# Altium PCB ESIMA_E_Meter_CPU Stand 2014_11_24.PcbDoc (part 1 of 2)
Units mm, origin at the board's own origin, x right, y up, seen from the top; angles counter-clockwise.
Board outline 113.5 x 71.72 mm, 4 copper layers (Top Layer, Mid1, Mid2, Bottom Layer), stack 0.778 mm thick; 166 components, 164 nets, 522 pads, 109 vias.
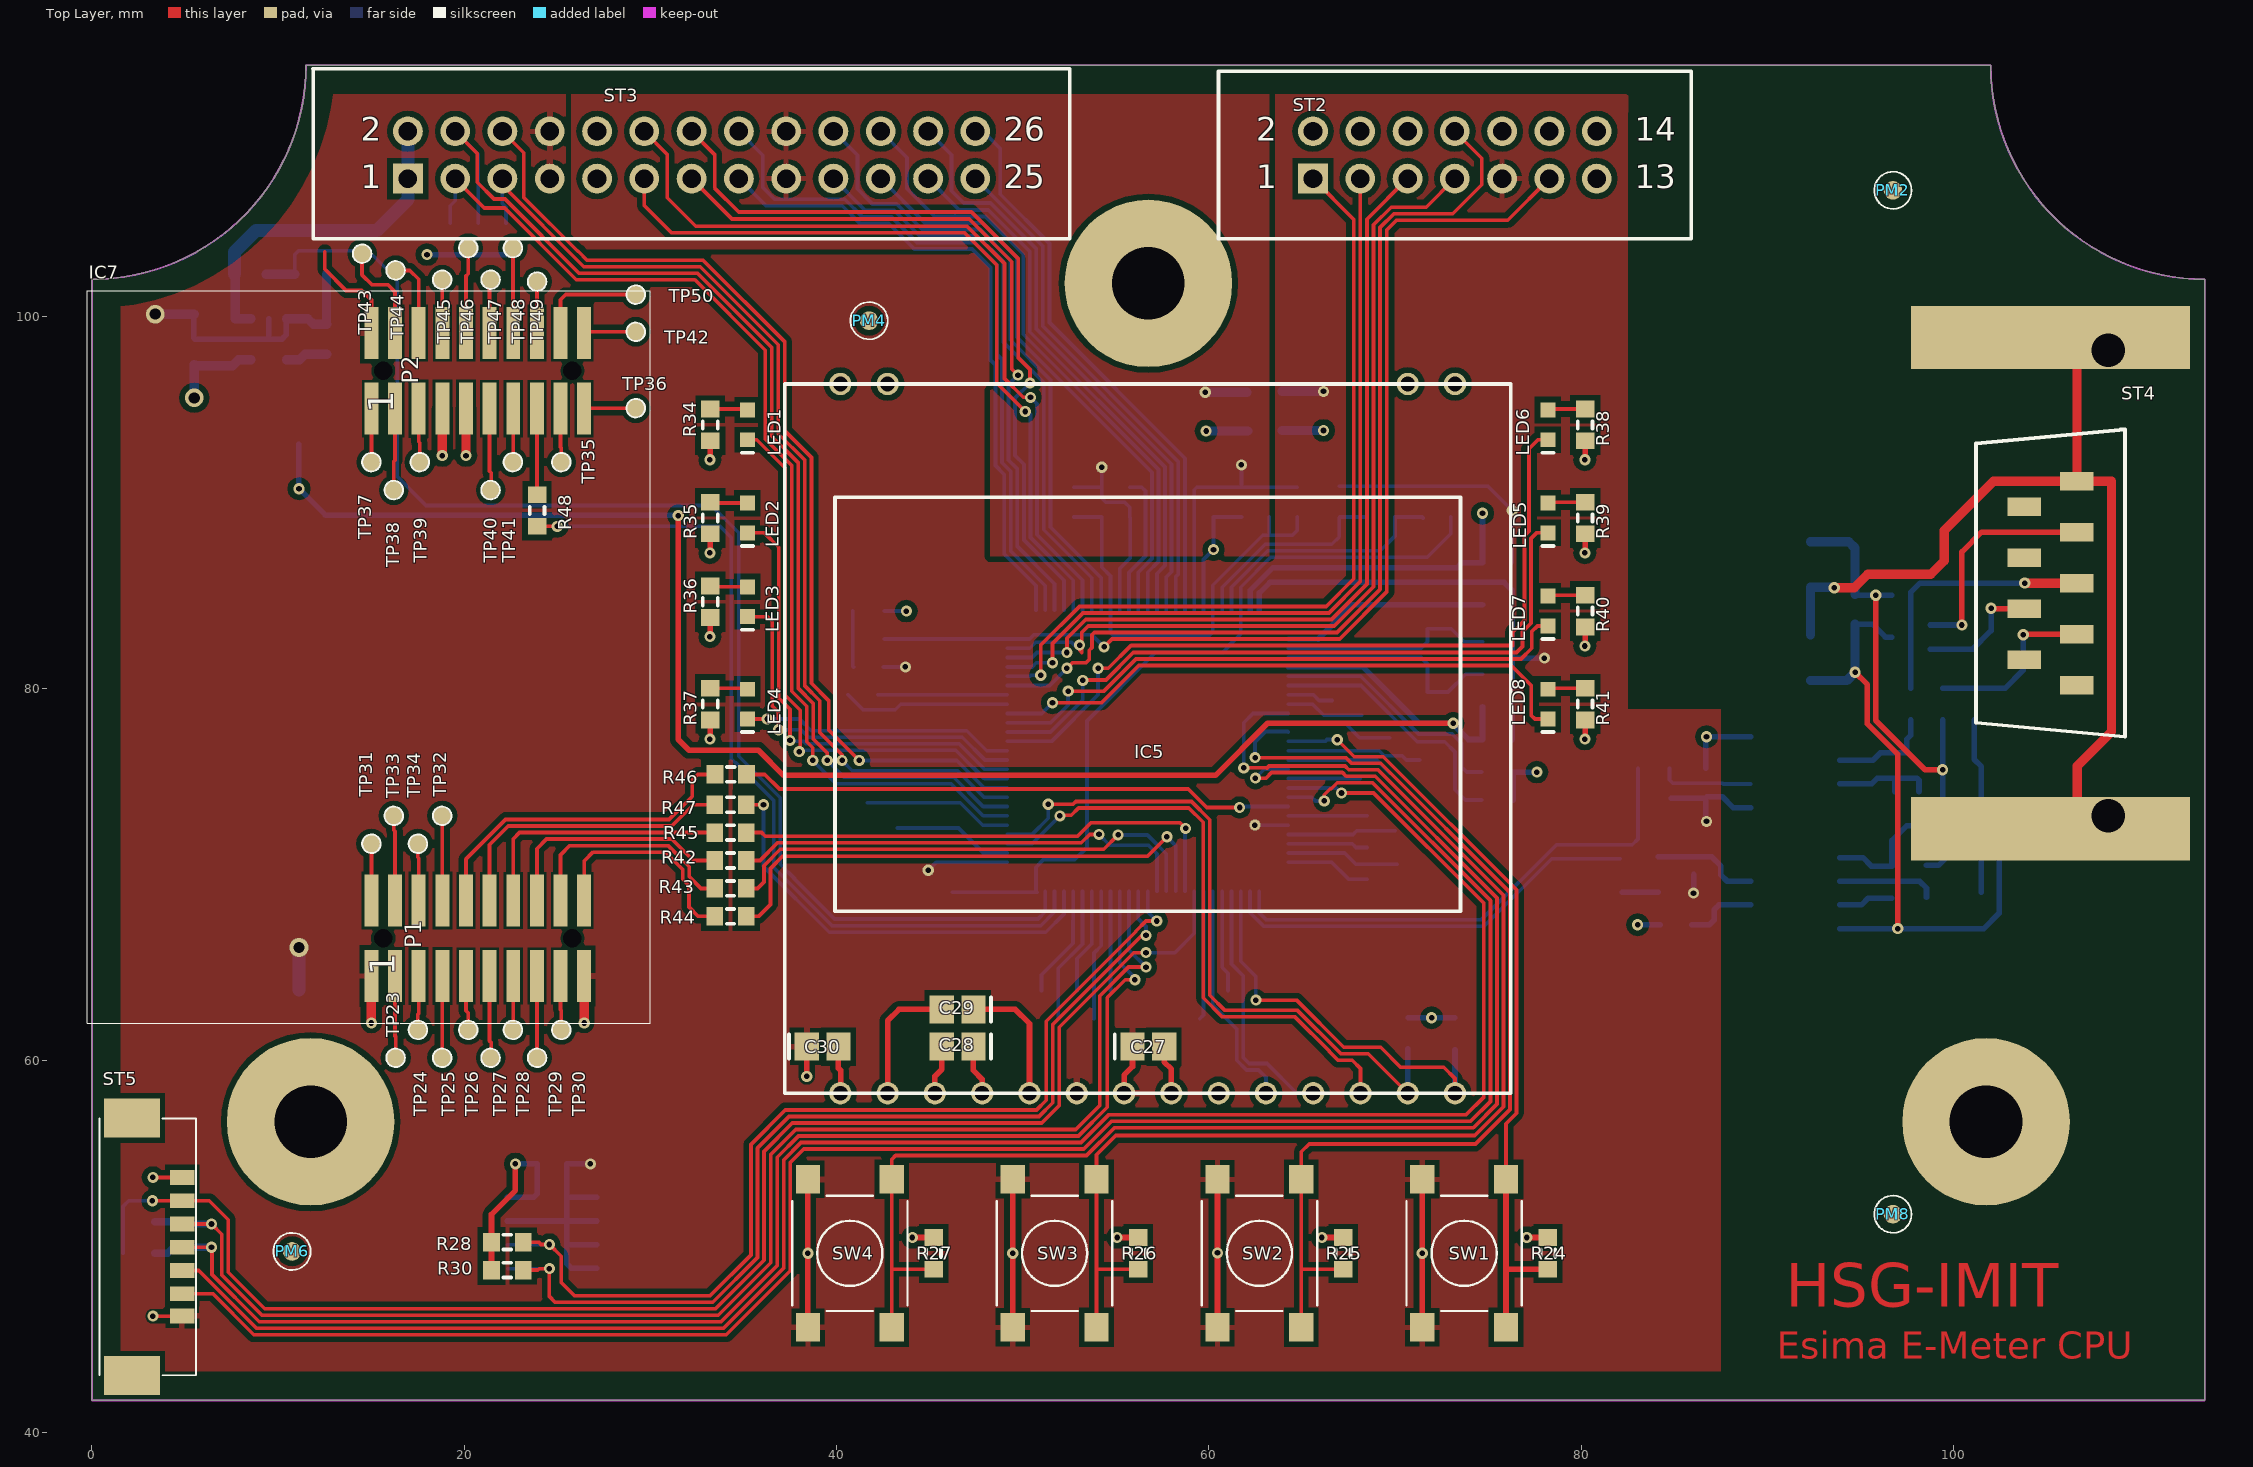
[diagram p0: Top Layer view]
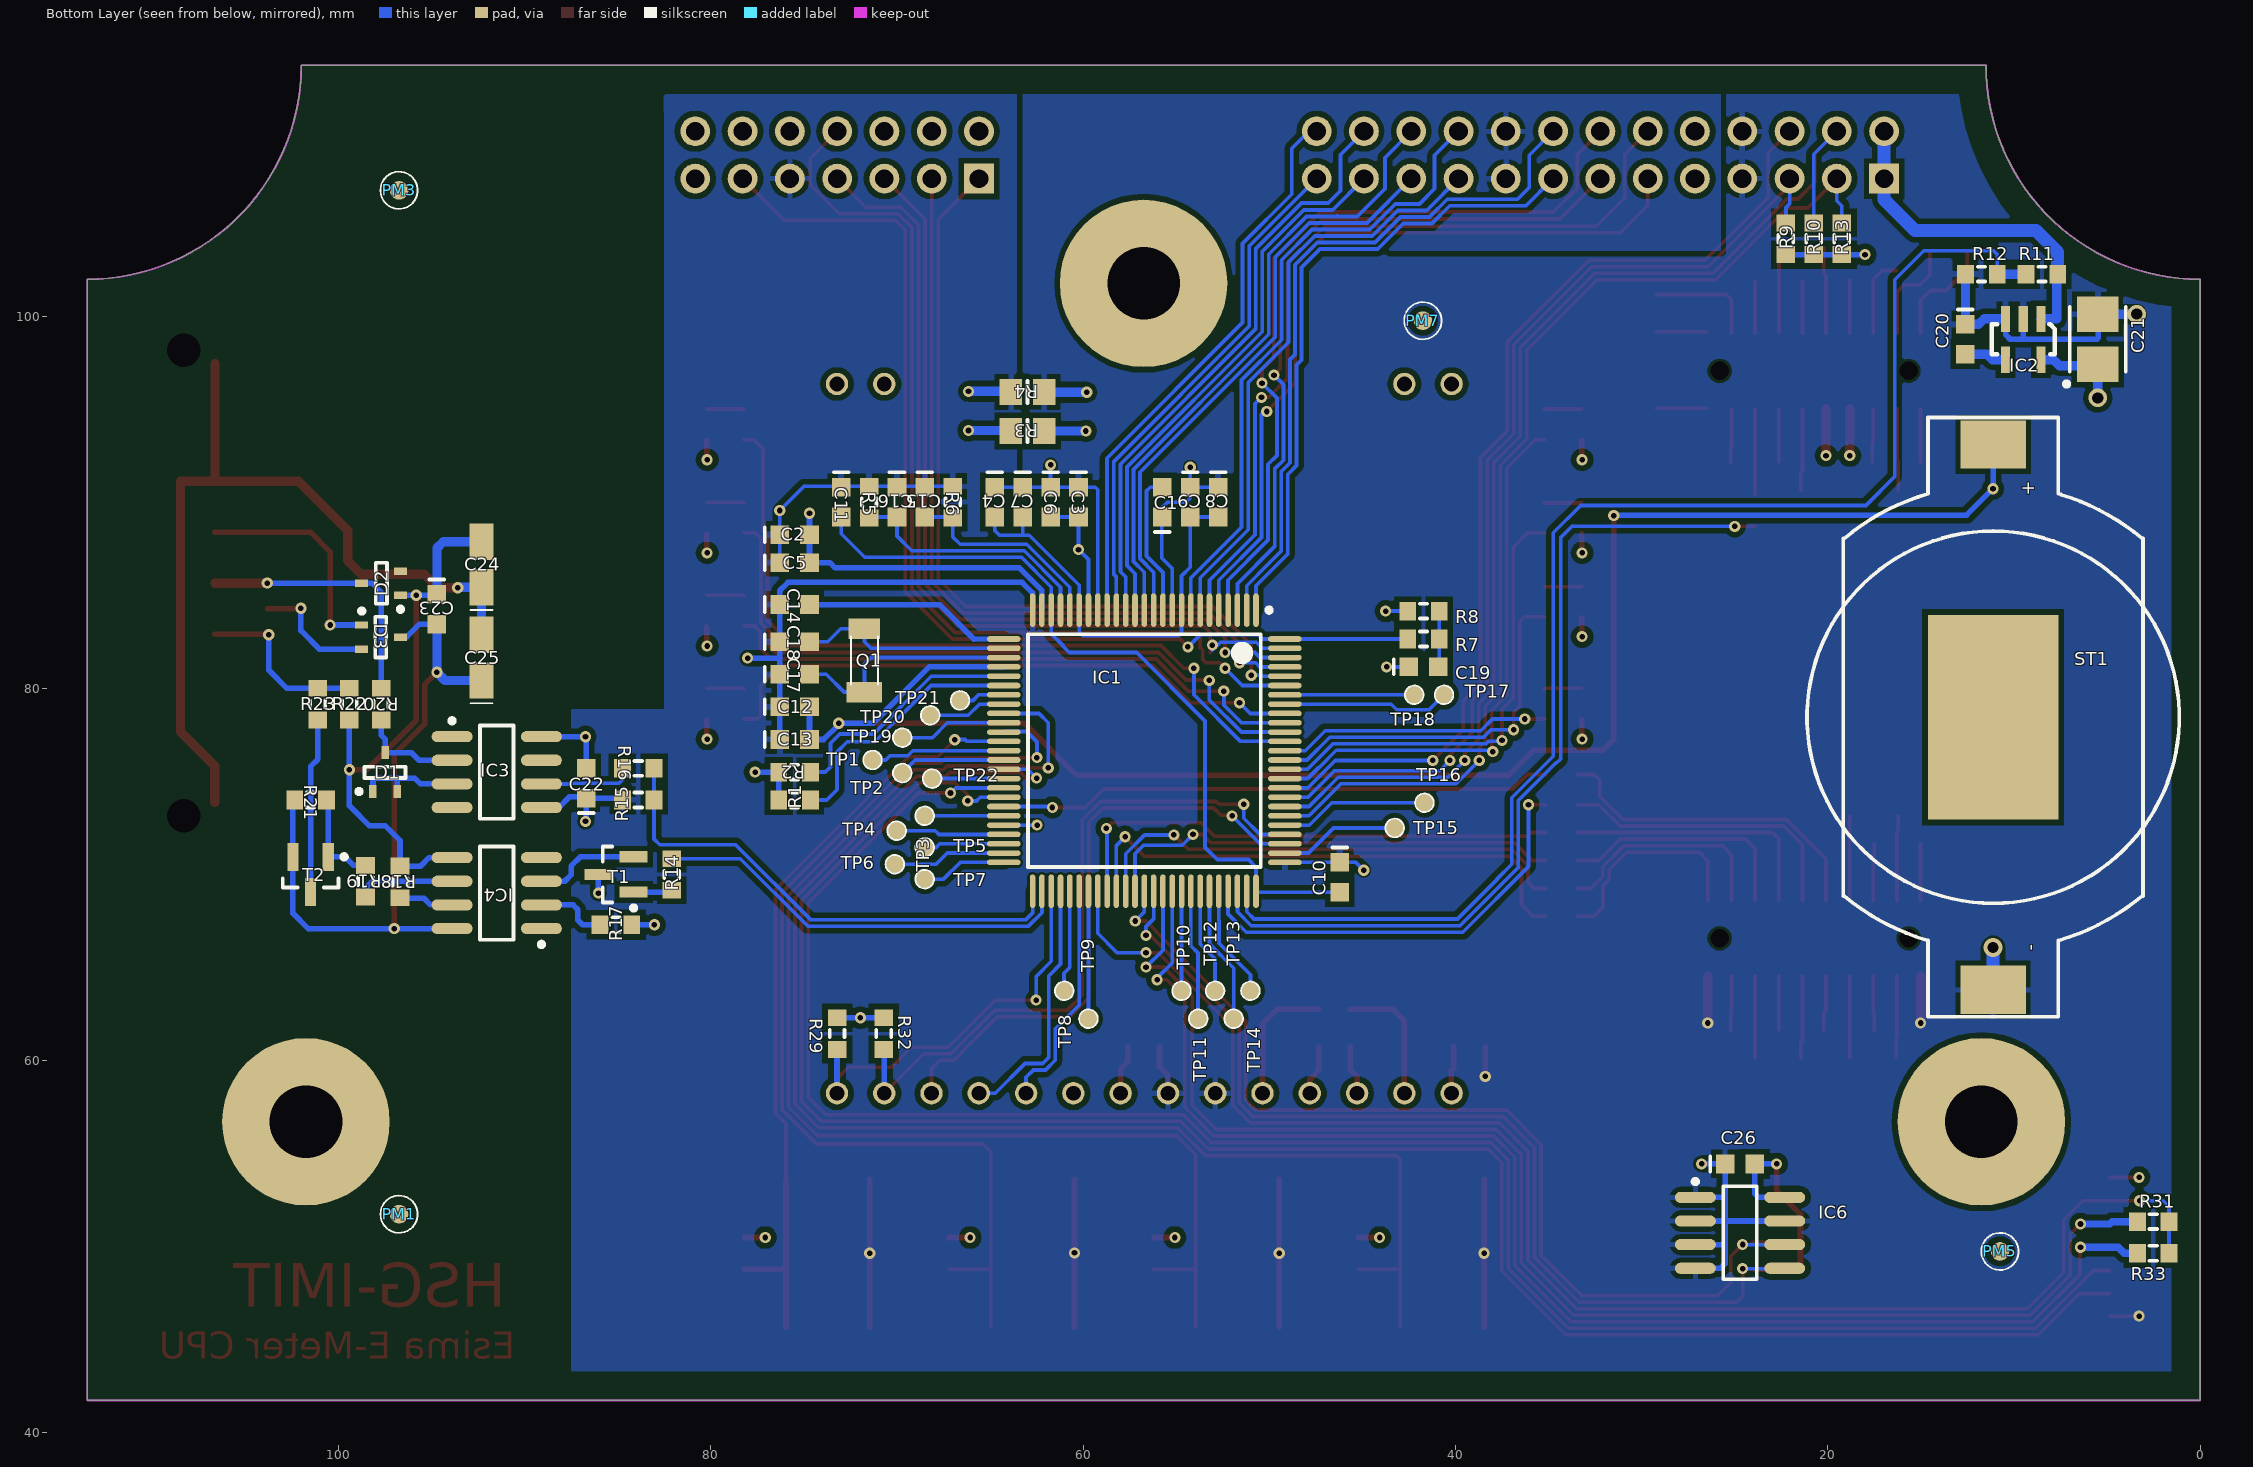
[diagram p1: Bottom Layer view, seen from below]
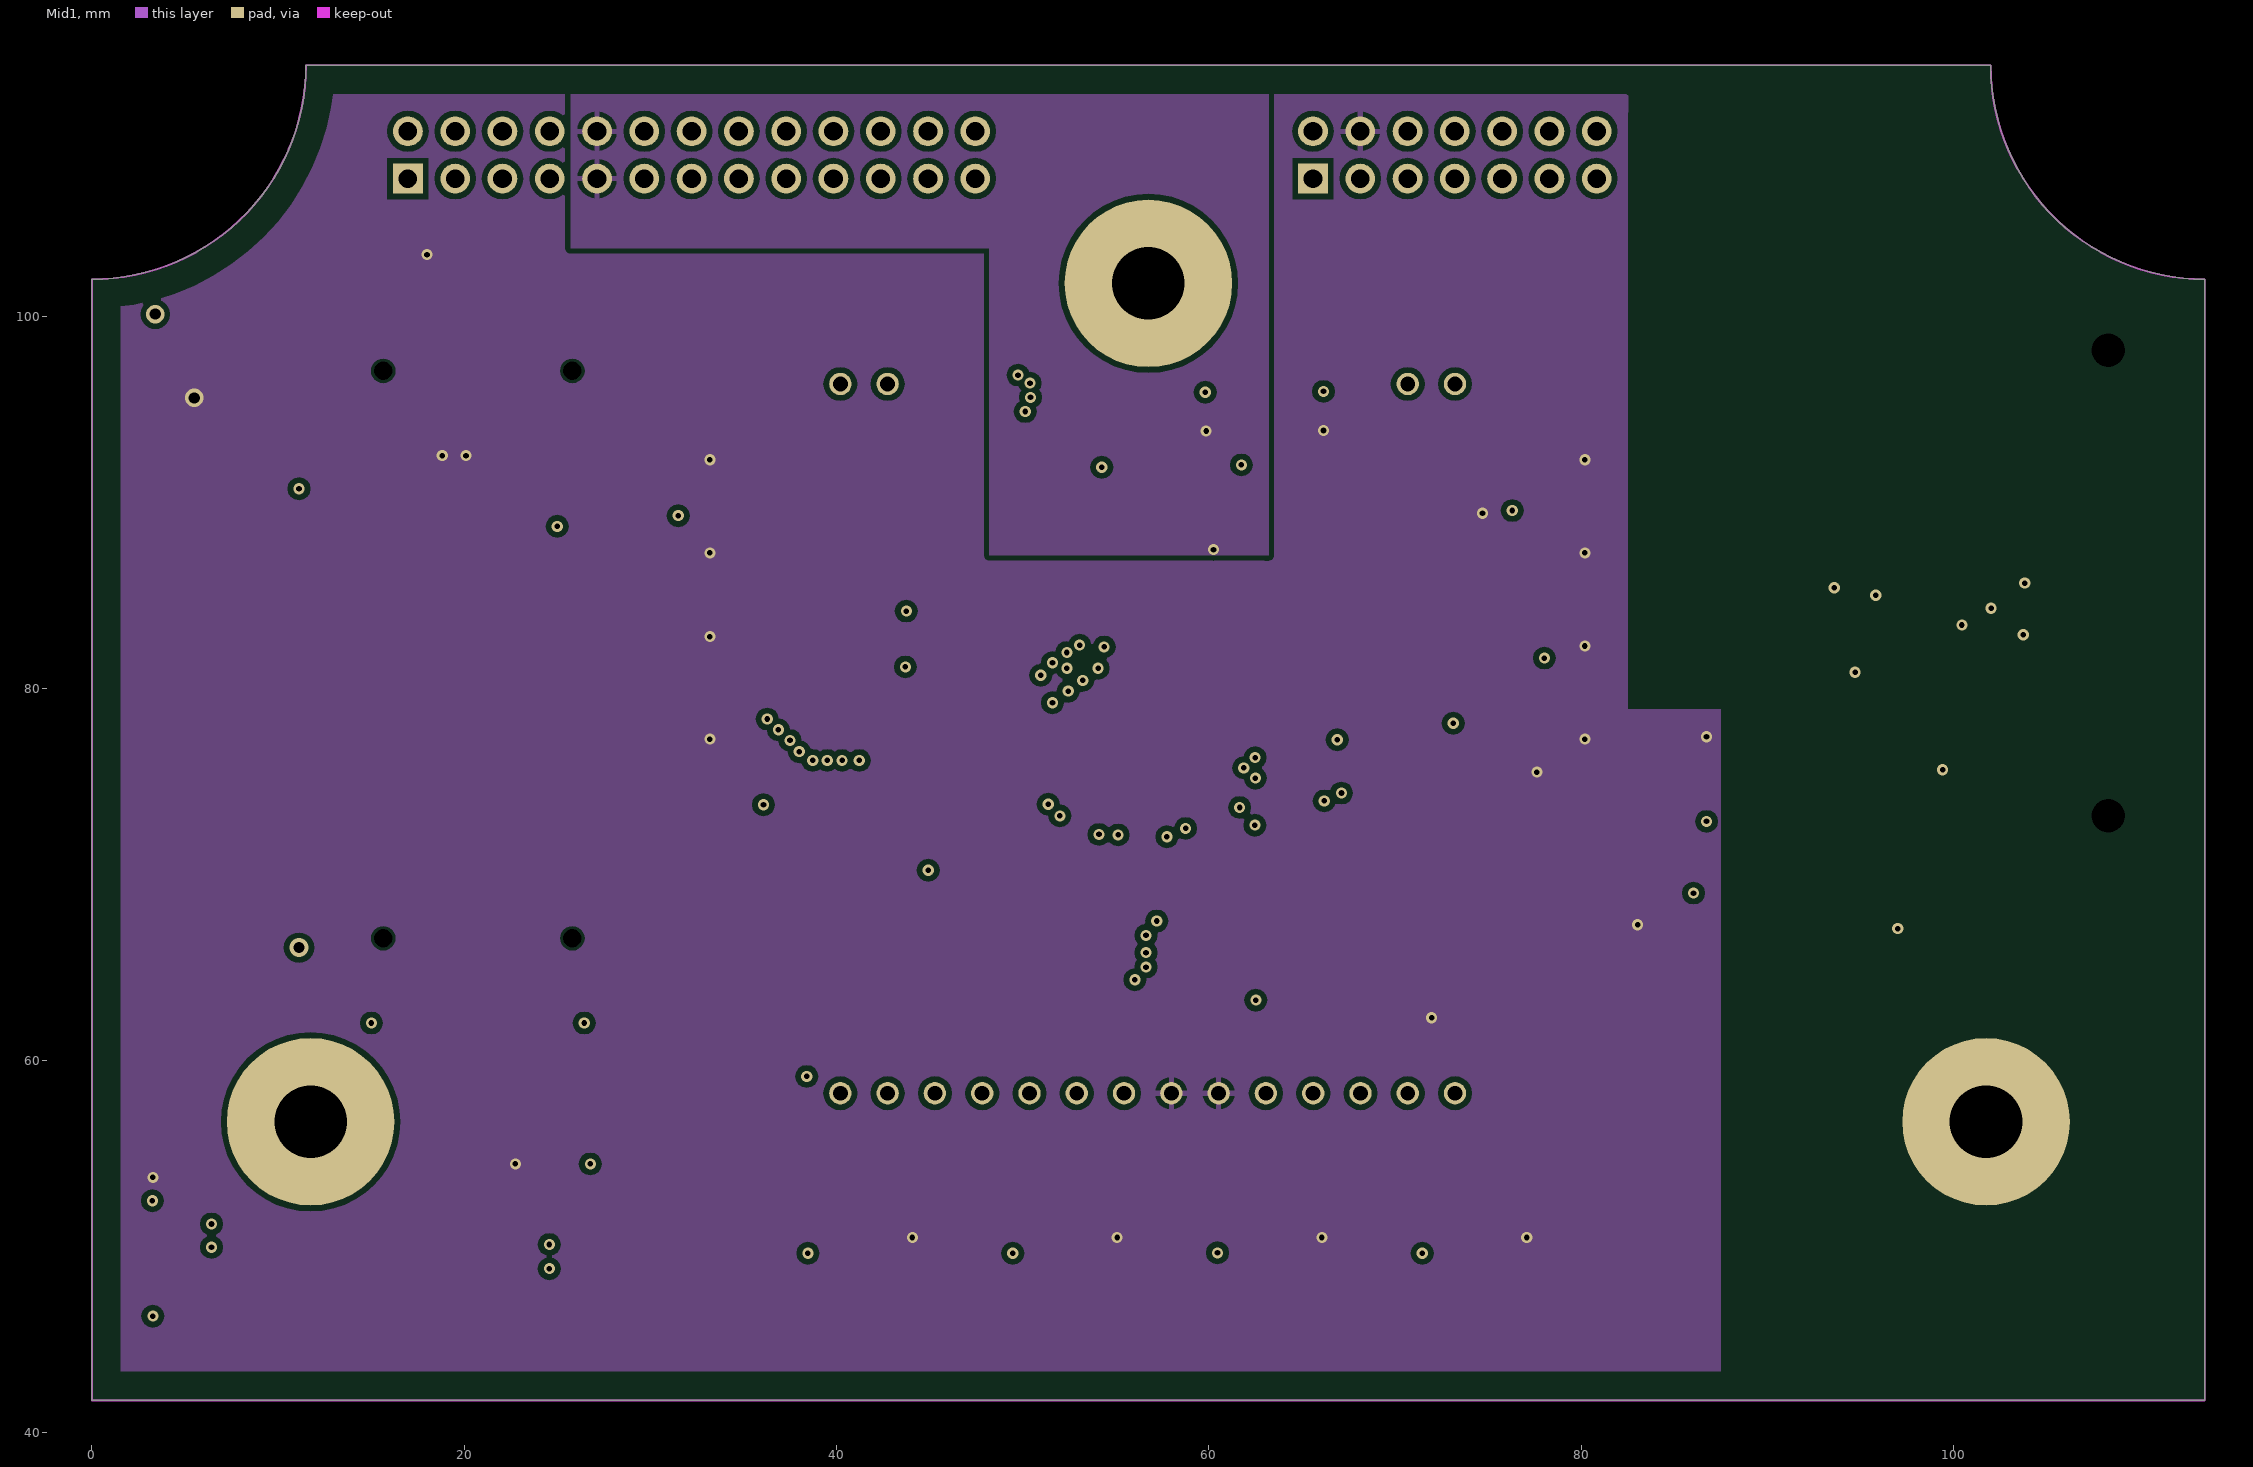
[diagram p2: Mid1]
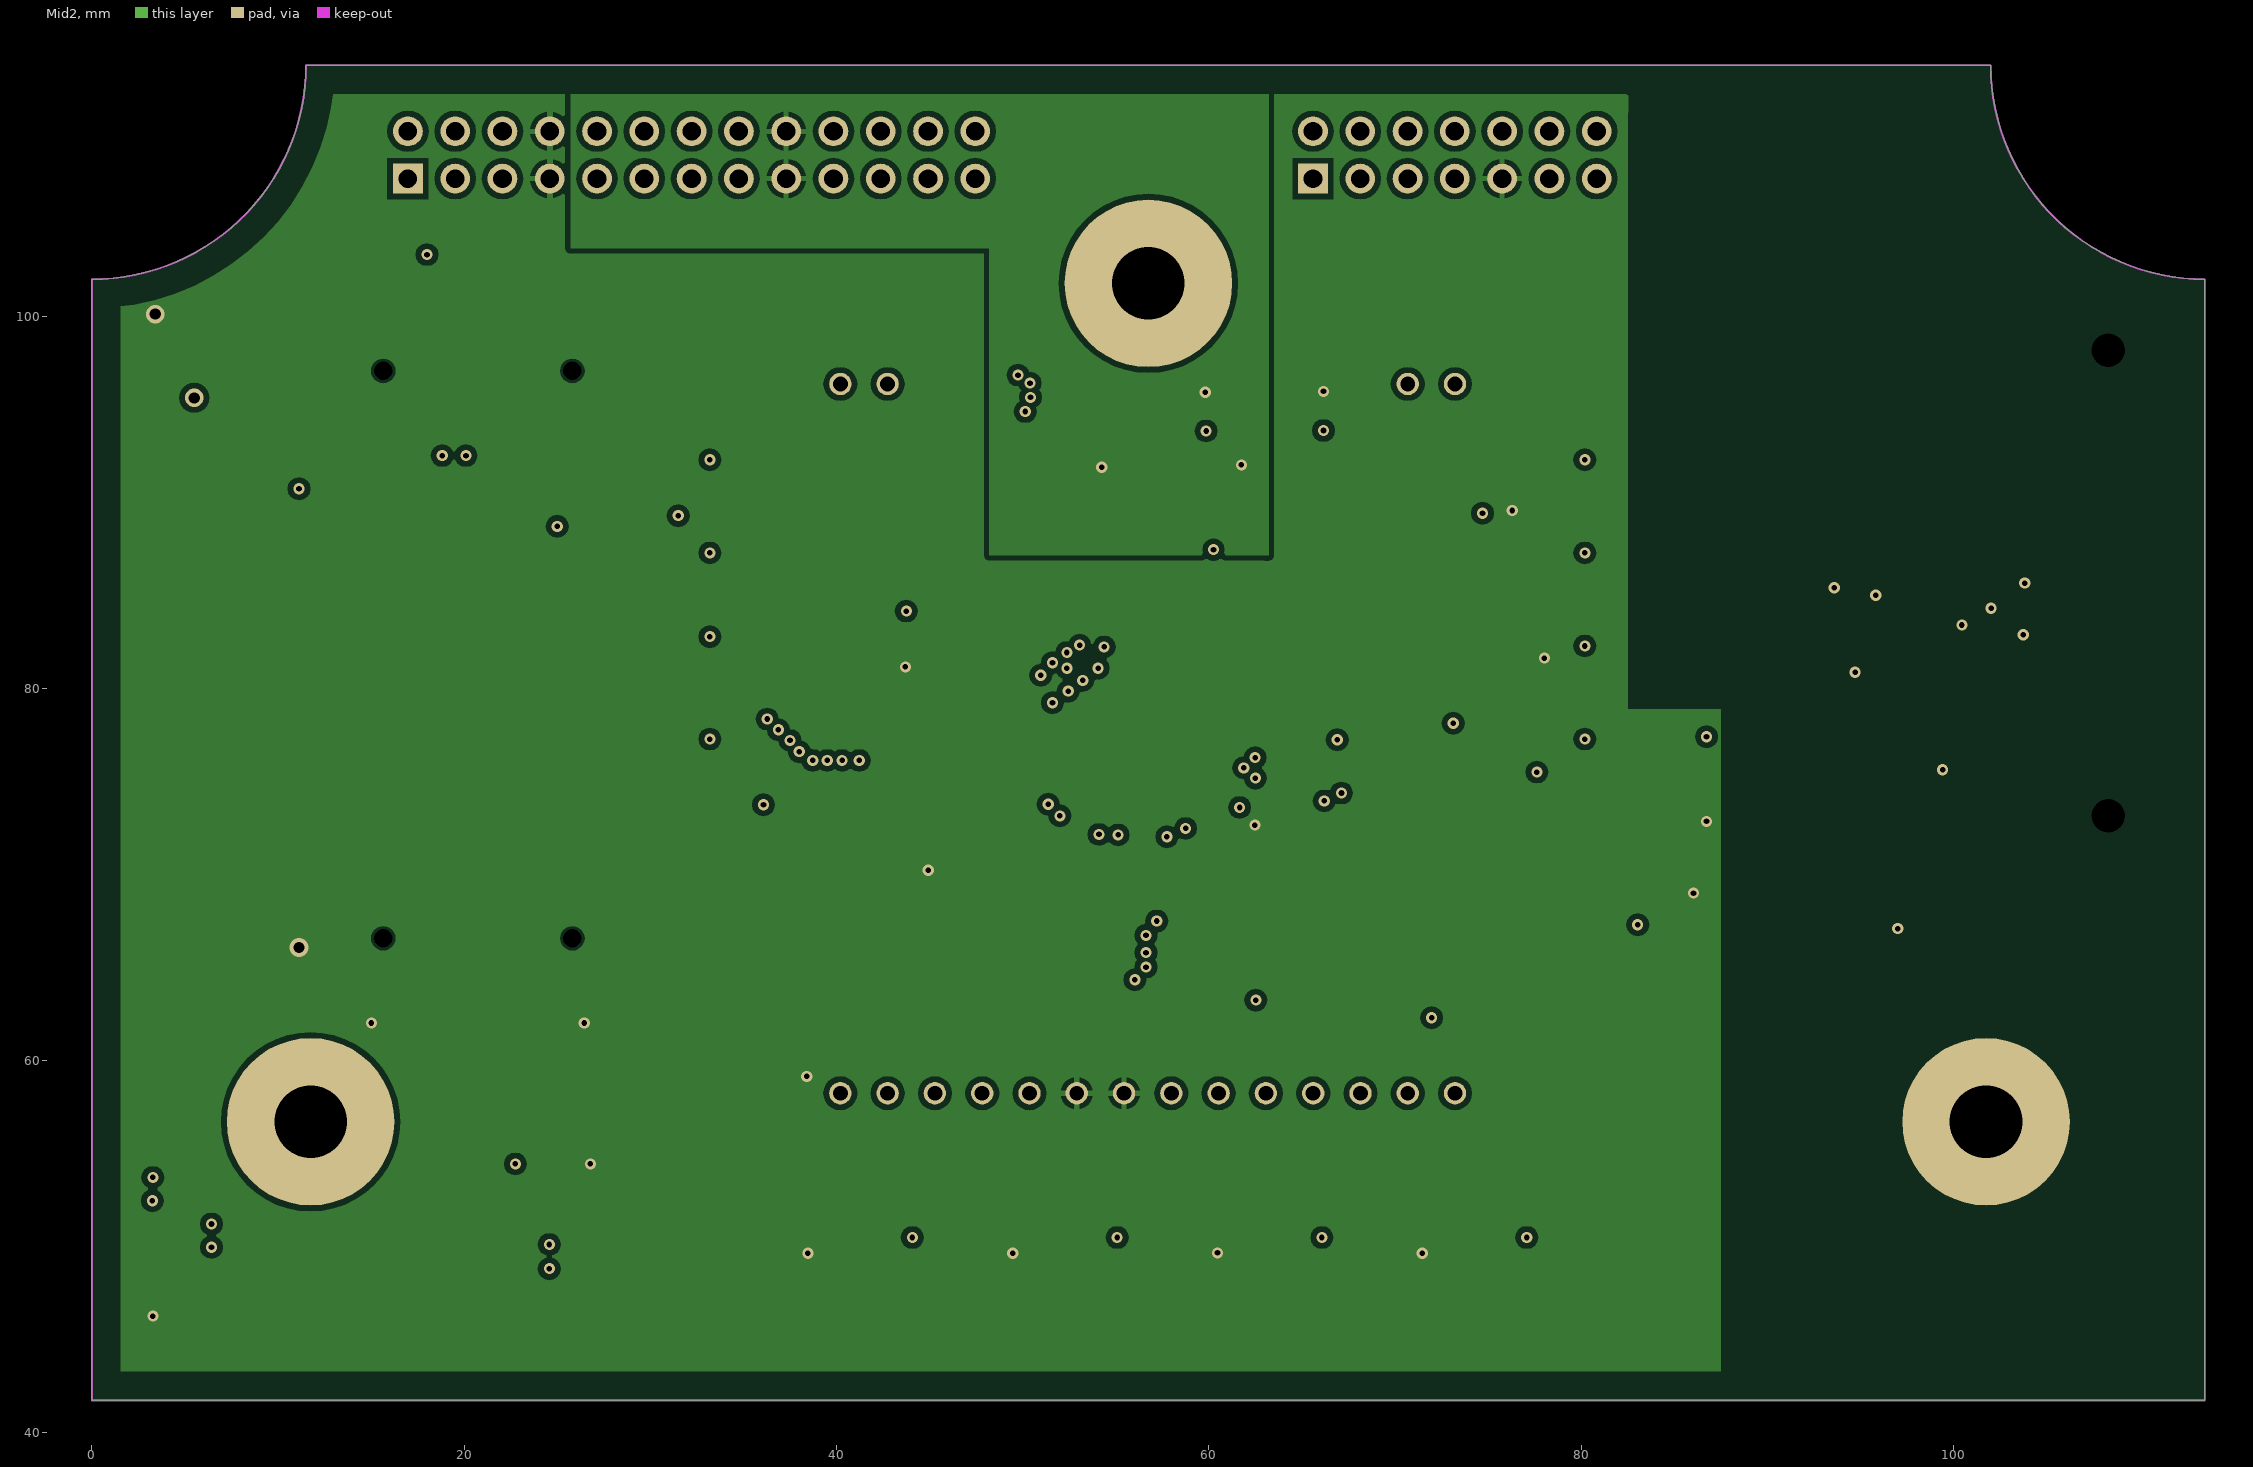
[diagram p3: Mid2]

## Layer stack, top to bottom
Top Solder: solder mask 0.0102, Solder Resist, Dk 3.5
Top Layer: signal copper 0.0356
Dielectric 1: core 0.254, FR-4, Dk 4.2
Mid1: signal copper 0.036
Dielectric 2: prepreg 0.127, Dk 4.2
Mid2: signal copper 0.036
Dielectric 3: core 0.254, Dk 4.2
Bottom Layer: signal copper 0.0356
Solder Side: solder mask 0.0102, Solder Resist, Dk 3.5

## Board outline
0,41.75 0,101.972 ccw(c0,113.472) 11.5,113.472 102,113.472 ccw(c113.5,113.472) 113.5,101.972 113.5,41.75

## Design rules (kind name [scope] priority, off if disabled: settings)
Clearance FineComponents [InComponent('IC1')   or InComponent('IC7')] p1: gap=0.15
Clearance Via-Trace [(IsVia) vs (IsTrack)or(isVia)] p2: gap=0.15
Clearance Via-Pad [(IsVia) vs (InPadClass('All Pads'))] p3: gap=0.1
Clearance Pad-Trace [(InPadClass('All Pads')) vs IsTrack] p4: gap=0.2
Clearance Trace-Trace [IsTrack vs IsTrack] p5: gap=0.15
Clearance Polygon-KeepOut [InPolygon vs (OnLayer('Keep-Out Layer'))] p6: gap=1.5
Clearance "Polygon - All" [InPolygon] p7: gap=0.3
Clearance [All] p8: gap=0.3
Clearance "All Rest" [All] p9: gap=0.3
ComponentClearance [All] p1: gap=0.4 collisioncheckmode=3 verticalgap=0.4 showdistances=FALSE
FabricationTestPointUsage TestPointUsage [All] p1: valid=0 allowmultiple=FALSE
FabricationTestpoint Testpoint [(IsPad And (OnTopLayer Or OnBottomLayer))] p1: side=3 testpointundercomponent=TRUE minsize=0.8 maxsize=1.2 preferedsize=1 minholesize=0 maxholesize=0 preferedholesize=0 testpointgrid=0.1 allowsidetop=TRUE allowsidebottom=TRUE usegrid=TRUE gridtolerance=0
Height [All] p1: minheight=0 maxheight=14.5 prefheight=10
HoleSize [All] p1: absolutevalues=TRUE maxlimit=5.5 minlimit=0.2 maxpercent=80.000 minpercent=20.000
PlaneClearance [All] p1: clearance=0.2
PlaneConnect [All] p1: planeconnectstyle=Relief reliefexpansion=0.5 reliefentries=4 reliefconductorwidth=0.5 reliefairgap=0.2
PolygonConnect VIA [All vs ISVIA] p1: connectstyle=Direct reliefconductorwidth=0.254 reliefentries=4 polygonreliefangle="90 Angle" airgapwidth=0.254
PolygonConnect [All] p2: connectstyle=Relief reliefconductorwidth=0.3 reliefentries=4 polygonreliefangle="90 Angle" airgapwidth=0.254
RoomDefinition "U_ESIMA E-Meter_RS232" [InComponentClass('U_ESIMA E-Meter_RS232')] p1: confinementstyle=ConfineIn formatcopy=TRUE lockcomponents=FALSE outline 79.75,64.5 114.75,64.5 114.75,102.5 79.75,102.5
RoomDefinition "U_ESIMA E-Meter_Radio" [InComponentClass('U_ESIMA E-Meter_Radio')] p2: confinementstyle=ConfineIn formatcopy=TRUE lockcomponents=FALSE outline -4.877,47.1 37,47.1 37,115.25 -4.877,115.25
RoomDefinition "U_ESIMA E-Meter_LCD" [InComponentClass('U_ESIMA E-Meter_LCD')] p3: confinementstyle=ConfineIn formatcopy=TRUE lockcomponents=FALSE outline -2.718,41.275 116.129,41.275 116.129,114.25 -2.718,114.25
RoomDefinition "U_ESIMA E-Meter_CPU" [InComponentClass('U_ESIMA E-Meter_CPU')] p4: confinementstyle=ConfineIn formatcopy=TRUE lockcomponents=FALSE outline -3.785,41.148 115.715,41.148 115.715,114 -3.785,114
RoomDefinition "ESIMA E-Meter_CPUBlock" [InComponentClass('ESIMA E-Meter_CPUBlock')] p5: confinementstyle=ConfineIn formatcopy=TRUE lockcomponents=FALSE outline -4.5,103.276 53.543,103.276 53.543,114.5 -4.5,114.5
RoutingCorners [All] p1: cornerstyle=45-Degree minsetback=0.5 maxsetback=1
RoutingVias [All] p1: holewidth=0.3 width=0.6 viastyle="Through Hole" minholewidth=0.3 minwidth=0.6 maxholewidth=0.4 maxwidth=1
SilkToSolderMaskClearance SilkscreenOverComponentPads [IsPad] p1: minsilkscreentomaskgap=0.254 clearancetoexposedcopper=TRUE
SolderMaskExpansion [All] p1: expansion=0
UnpouredPolygon [All] p1: allowunpoured=FALSE
Width [All] p1: maxlimit=1 minlimit=0.15 preferedwidth=0.2 minimp=50.000000 maximp=50.000000 favimp=50.000000
20 further rules are at their usual default settings.

## Classes and differential pairs
net class V-[1..3]: V-1 V-2 V-3
net class V+[1..3]: V+1 V+2 V+3
net class I-[1..4]: I-1 I-2 I-3 I-4
net class I+[1..4]: I+1 I+2 I+3 I+4
component class "U_ESIMA E-Meter_RS232": C22 C23 C24 C25 D1 D2 D3 IC3 IC4 R14 R15 R16 R17 R18 R19 R20 R21 R22 R23 ST4 T1 T2
component class "U_ESIMA E-Meter_CPU": C1 C2 C3 C4 C5 C6 C7 C8 C9 C10 C11 C12 C13 C14 C15 C16 C17 C18 C19 C20 C21 IC1 IC2 Q1 R1 R2 R3 R4 R5 R6 R7 R8 R9 R10 R11 R12 R13 ST1 ST2 TP1 TP2 TP3 TP4 TP5 TP6 TP7 TP8 TP9 TP10 TP11 TP12 TP13 TP14 TP15 TP16 TP17 TP18 TP19 TP20 TP21 TP22
component class "ESIMA E-Meter_CPUBlock": ST3
component class "U_ESIMA E-Meter_LCD": C26 C27 C28 C29 C30 IC5 IC6 LED1 LED2 LED3 LED4 LED5 LED6 LED7 LED8 PM1 PM2 PM3 PM4 PM5 PM6 PM7 PM8 R24 R25 R26 R27 R28 R29 R30 R31 R32 R33 R34 R35 R36 R37 R38 R39 R40 R41 ST5 SW1 SW2 SW3 SW4
component class "U_ESIMA E-Meter_Radio": IC7 R42 R43 R44 R45 R46 R47 R48 TP23 TP24 TP25 TP26 TP27 TP28 TP29 TP30 TP31 TP32 TP33 TP34 TP35 TP36 TP37 TP38 TP39 TP40 TP41 TP42 TP43 TP44 TP45 TP46 TP47 TP48 TP49 TP50 TP51 TP52
net class BT[1..4]: BT1 BT2 BT3 BT4
net class LED[1..8]: LED1 LED2 LED3 LED4 LED5 LED6 LED7 LED8

## Components (designator, comment, footprint, x,y, rotation, side; value= is the part's Value field where it differs from the comment)
C1 "100nF" CAPC1608N 55.75,90 r90 bottom
C2 "4.7uF" CAPC1608N 75.5,88.25 r180 bottom
C3 "4.7uF" CAPC1608N 60.25,90 r270 bottom
C4 "4.7uF" CAPC1608N 64.75,90 r270 bottom
C5 "100nF" CAPC1608N 75.5,86.75 r180 bottom
C6 "100nF" CAPC1608N 61.75,90 r270 bottom
C7 "100nF" CAPC1608N 63.25,90 r270 bottom
C8 "4.7uF" CAPC1608N 52.75,90 r270 bottom
C9 "100nF" CAPC1608N 54.25,90 r270 bottom
C10 "100nF" CAPC1608N 46.215,69.85 r270 bottom
C11 "4.7uF" CAPC1608N 73,90 r270 bottom
C12 "0.47uF" CAPC1608N 75.5,79 r180 bottom
C13 "100nF" CAPC1608N 75.5,77.25 r180 bottom
C14 "0.47uF" CAPC1608N 75.5,84.5 r180 bottom
C15 "na" CAPC1608N 68.5,90 r270 bottom
C16 "na" CAPC1608N 70,90 r270 bottom
C17 "DNP" CAPC1608N 75.5,80.75 r180 bottom
C18 "DNP" CAPC1608N 75.5,82.5 r180 bottom
C19 "2.2nF" CAPC1608N 41.715,81.15 r180 bottom
C20 "10nF" CAPC1608N 12.615,98.75 r270 bottom
C21 "4.7uF" "Cap Tant Pol Form B" 5.5,98.75 r90 bottom
C22 "100nF" CAPC1608N 86.7,74.9 r90 bottom
C23 "100nF" CAPC1608N 94.715,84.25 r270 bottom
C24 "10uF/16V" "Cap Tant Pol Form A" 92.315,86.65 r90 bottom
C25 "10uF/16V" "Cap Tant Pol Form A" 92.315,81.65 r90 bottom
C26 "100nF" CAPC1608N 24.715,54.45 r180 bottom
C27 "1uF" CAPC2012N 56.75,60.75 r0 top
C28 "1uF" CAPC2012N 46.5,60.75 r180 top
C29 "1uF" CAPC2012N 46.5,62.75 r180 top
C30 "1uF" CAPC2012N 39.25,60.75 r0 top
D1 "BAS40-05W" "SOT-323N (SC-70)" 97.5,75.5 r180 bottom
D2 "BAS40-05W" "SOT-323N (SC-70)" 97.715,85.65 r90 bottom
D3 "BAS40-05W" "SOT-323N (SC-70)" 97.715,82.75 r270 bottom
IC1 "MSP430F6779APZ" TI-PZ100_N 56.715,76.65 r270 bottom locked
IC2 "TPS78930" "TI-DBV5 (SOT23-5)" 9.5,98.75 r270 bottom
IC3 "PS8801" SOIC127P600-8N 91.5,75.5 r180 bottom
IC4 "PS8801" SOIC127P600-8N 91.5,69 r0 bottom
IC5 "EA DOGS102x-6" "EA DOGS102X-6" 56.715,79.15 r180 top locked
IC6 "24C02C-E/SN" SOIC-SN8_N 24.715,50.75 r180 bottom
IC7 "CC2541EM#" CC2530EM-Board 30,62 r90 top locked
LED1 "150060SS75000" 0603 35.215,94.15 r90 top
LED2 "150060VS75000" 0603 35.215,89.15 r90 top
LED3 "150060YS75000" 0603 35.215,84.65 r90 top
LED4 "150060SS75000" 0603 35.215,79.15 r90 top
LED5 "150060VS75000" 0603 78.215,89.15 r90 top
LED6 "150060SS75000" 0603 78.215,94.15 r90 top
LED7 "150060YS75000" 0603 78.215,84.15 r90 top
LED8 "150060SS75000" 0603 78.215,79.15 r90 top
PM1 "Passmarke 1mm" "Passmarke Rund 1mm" 96.75,51.75 r180 bottom
PM2 "Passmarke 1mm" "Passmarke Rund 1mm" 96.75,106.75 r0 top
PM3 "Passmarke 1mm" "Passmarke Rund 1mm" 96.75,106.75 r180 bottom
PM4 "Passmarke 1mm" "Passmarke Rund 1mm" 41.75,99.75 r0 top
PM5 "Passmarke 1mm" "Passmarke Rund 1mm" 10.75,49.75 r180 bottom
PM6 "Passmarke 1mm" "Passmarke Rund 1mm" 10.75,49.75 r0 top
PM7 "Passmarke 1mm" "Passmarke Rund 1mm" 41.75,99.75 r180 bottom
PM8 "Passmarke 1mm" "Passmarke Rund 1mm" 96.75,51.75 r0 top
Q1 "CM415 32.768KDZF-UT" "Quarz 2 Pin 4.1mm * 1.5mm" 71.75,81.5 r90 bottom
R1 "100k" RESC1608N 75.5,74 r0 bottom
R2 "100k" RESC1608N 75.5,75.5 r0 bottom
R3 "1k" RESC2012N 62.985,93.825 r0 bottom
R4 "1k" RESC2012N 62.985,95.925 r0 bottom
R5 "0" RESC1608N 71.5,90 r270 bottom
R6 "0" RESC1608N 67,90 r270 bottom
R7 "10k" RESC1608N 41.715,82.65 r180 bottom
R8 "47k" RESC1608N 41.715,84.15 r180 bottom
R9 "470k" RESC1608N 22.25,104.15 r90 bottom
R10 "470k" RESC1608N 20.75,104.15 r90 bottom
R11 "nd" RESC1608N 8.5,102.25 r180 bottom
R12 "nd" RESC1608N 11.75,102.25 r180 bottom
R13 "470k" RESC1608N 19.25,104.15 r90 bottom
R14 "2.2k" RESC1608N 82.1,70 r90 bottom
R15 "DNP" RESC1608N 83.9,74 r0 bottom
R16 "2.2k" RESC1608N 83.9,75.7 r180 bottom
R17 "68" RESC1608N 85.1,67.3 r0 bottom
R18 "DNP" RESC1608N 96.7,69.6 r270 bottom
R19 "1k" RESC1608N 98.55,69.635 r270 bottom
R20 "1k" RESC1608N 97.715,79.15 r270 bottom
R21 "10k" RESC1608N 101.5,74 r180 bottom
R22 "1.5k" RESC1608N 99.415,79.15 r90 bottom
R23 "220" RESC1608N 101.115,79.15 r90 bottom
R24 "100k" RESC1608N 78.215,49.65 r90 top
R25 "100k" RESC1608N 67.215,49.65 r90 top
R26 "100k" RESC1608N 56.215,49.65 r90 top
R27 "100k" RESC1608N 45.215,49.65 r90 top
R28 "10k" RESC1608N 22.315,48.75 r180 top
R29 "47k" RESC1608N 73.215,61.45 r270 bottom
R30 "10k" RESC1608N 22.315,50.25 r180 top
R31 "10k" RESC1608N 2.515,51.35 r180 bottom
R32 "47k" RESC1608N 70.715,61.45 r270 bottom
R33 "10k" RESC1608N 2.515,49.65 r180 bottom
R34 "nd" RESC1608N 33.215,94.15 r90 top
R35 "nd" RESC1608N 33.215,89.15 r90 top
R36 "nd" RESC1608N 33.215,84.65 r90 top
R37 "nd" RESC1608N 33.215,79.15 r90 top
R38 "nd" RESC1608N 80.215,94.15 r90 top
R39 "nd" RESC1608N 80.215,89.15 r90 top
R40 "nd" RESC1608N 80.215,84.15 r90 top
R41 "nd" RESC1608N 80.215,79.15 r90 top
R42 "0" RESC1608N 34.305,70.75 r0 top
R43 "0" RESC1608N 34.305,69.25 r0 top
R44 "0" RESC1608N 34.305,67.75 r0 top
R45 "0" RESC1608N 34.305,72.25 r0 top
R46 "0" RESC1608N 34.315,75.375 r0 top
R47 "0" RESC1608N 34.305,73.75 r0 top
R48 "0" RESC1608N 23.915,89.55 r270 top
ST1 "MULTICOMP  CH004-2032LF" "MULTICOMP  CH004-2032LF" 11.115,78.45 r270 bottom
ST2 "HARTING - 9818514" "HARTING -09 18 514 7324" 73.215,108.65 r0 top
ST3 "HARTING -09 18 526 7324" "HARTING -09 18 526 7324" 32.215,108.65 r0 top
ST4 "HARTING - 09 55 115 6611 741" "HARTING D-SUB SMT 9 POLES" 105.215,85.65 r270 top
ST5 "Molex 533980771" "Molex 533980771" 3.5,50 r90 top
SW1 "WE-Tact Switches WS-TASV 430152130826" 430152130826 73.715,49.65 r90 top
SW2 "WE-Tact Switches WS-TASV 430152130826" 430152130826 62.715,49.65 r90 top
SW3 "WE-Tact Switches WS-TASV 430152130826" 430152130826 51.715,49.65 r90 top
SW4 "WE-Tact Switches WS-TASV 430152130826" 430152130826 40.715,49.65 r90 top
T1 "BC857B" SOT23-3N 85.1,70 r0 bottom
T2 "BC857B" SOT23-3N 101.5,70 r270 bottom
TP1 "Testpoint 1mm" "Testpoint 1mm" 71.315,76.15 r90 bottom
TP2 "Testpoint 1mm" "Testpoint 1mm" 69.715,75.45 r90 bottom
TP3 "Testpoint 1mm" "Testpoint 1mm" 68.515,73.15 r90 bottom
TP4 "Testpoint 1mm" "Testpoint 1mm" 70.015,72.35 r90 bottom
TP5 "Testpoint 1mm" "Testpoint 1mm" 68.515,71.45 r90 bottom
TP6 "Testpoint 1mm" "Testpoint 1mm" 70.115,70.55 r90 bottom
TP7 "Testpoint 1mm" "Testpoint 1mm" 68.515,69.75 r90 bottom
TP8 "Testpoint 1mm" "Testpoint 1mm" 61.015,63.75 r90 bottom
TP9 "Testpoint 1mm" "Testpoint 1mm" 59.715,62.25 r90 bottom
TP10 "Testpoint 1mm" "Testpoint 1mm" 54.715,63.75 r90 bottom
TP11 "Testpoint 1mm" "Testpoint 1mm" 53.815,62.25 r90 bottom
TP12 "Testpoint 1mm" "Testpoint 1mm" 52.915,63.75 r90 bottom
TP13 "Testpoint 1mm" "Testpoint 1mm" 51.915,62.25 r90 bottom
TP14 "Testpoint 1mm" "Testpoint 1mm" 51.015,63.75 r90 bottom
TP15 "Testpoint 1mm" "Testpoint 1mm" 43.265,72.5 r90 bottom
TP16 "Testpoint 1mm" "Testpoint 1mm" 41.665,73.85 r90 bottom
TP17 "Testpoint 1mm" "Testpoint 1mm" 40.615,79.65 r90 bottom
TP18 "Testpoint 1mm" "Testpoint 1mm" 42.215,79.65 r90 bottom
TP19 "Testpoint 1mm" "Testpoint 1mm" 69.715,77.35 r90 bottom
TP20 "Testpoint 1mm" "Testpoint 1mm" 68.215,78.55 r90 bottom
TP21 "Testpoint 1mm" "Testpoint 1mm" 66.615,79.35 r90 bottom
TP22 "Testpoint 1mm" "Testpoint 1mm" 68.115,75.15 r90 bottom
TP23 "Testpoint 1mm" "Testpoint 1mm" 16.315,60.15 r90 top
TP24 "Testpoint 1mm" "Testpoint 1mm" 17.515,61.65 r90 top
TP25 "Testpoint 1mm" "Testpoint 1mm" 18.815,60.15 r90 top
TP26 "Testpoint 1mm" "Testpoint 1mm" 20.215,61.65 r90 top
TP27 "Testpoint 1mm" "Testpoint 1mm" 21.415,60.15 r90 top
TP28 "Testpoint 1mm" "Testpoint 1mm" 22.615,61.65 r90 top
TP29 "Testpoint 1mm" "Testpoint 1mm" 23.915,60.15 r90 top
TP30 "Testpoint 1mm" "Testpoint 1mm" 25.215,61.65 r90 top
TP31 "Testpoint 1mm" "Testpoint 1mm" 15.015,71.65 r90 top
TP32 "Testpoint 1mm" "Testpoint 1mm" 18.815,73.15 r90 top
TP33 "Testpoint 1mm" "Testpoint 1mm" 16.215,73.15 r90 top
TP34 "Testpoint 1mm" "Testpoint 1mm" 17.515,71.65 r90 top
TP35 "Testpoint 1mm" "Testpoint 1mm" 25.215,92.15 r90 top
TP36 "Testpoint 1mm" "Testpoint 1mm" 29.215,95.05 r90 top
TP37 "Testpoint 1mm" "Testpoint 1mm" 15.015,92.15 r90 top
TP38 "Testpoint 1mm" "Testpoint 1mm" 16.215,90.65 r90 top
TP39 "Testpoint 1mm" "Testpoint 1mm" 17.615,92.15 r90 top
TP40 "Testpoint 1mm" "Testpoint 1mm" 21.415,90.65 r90 top
TP41 "Testpoint 1mm" "Testpoint 1mm" 22.615,92.15 r90 top
TP42 "Testpoint 1mm" "Testpoint 1mm" 29.215,99.15 r90 top
TP43 "Testpoint 1mm" "Testpoint 1mm" 14.515,103.35 r90 top
TP44 "Testpoint 1mm" "Testpoint 1mm" 16.315,102.45 r90 top
TP45 "Testpoint 1mm" "Testpoint 1mm" 18.815,101.95 r90 top
TP46 "Testpoint 1mm" "Testpoint 1mm" 20.215,103.65 r90 top
TP47 "Testpoint 1mm" "Testpoint 1mm" 21.415,101.95 r90 top
TP48 "Testpoint 1mm" "Testpoint 1mm" 22.615,103.65 r90 top
TP49 "Testpoint 1mm" "Testpoint 1mm" 23.915,101.85 r90 top
TP50 "Testpoint 1mm" "Testpoint 1mm" 29.215,101.15 r90 top

## Footprints (in the part's own frame and the unit in brackets; to place one, negate y for a bottom-side part, rotate by r counter-clockwise, add the part's x,y. Pads: shape width x height; smd on the part's side, far side on the other; paste and mask are expansions set on the pad)
0603 [mm] "Chip LED, 2-Leads, Body 1.6x0.8mm, IPC Medium Density"
  rect 0.8x0.8 smd: 1(-0.8,0) 2(0.8,0)
  silkscreen extent -1.5,-0.3 -1.5,0.3, body extent -0.8,-0.4 0.8,0.4, height 0.7
430152130826 [mm] "6*6mm vertical type, SMD, height 13.0mm, white actuator, 260gf, T&R"
  rect 1.55x1.3 smd: 1(-3.975,2.25) 2(-3.975,-2.25) 3(3.975,2.25) 4(3.975,-2.25)
  silkscreen extent -3.1,-3.1 3.1,3.1, body extent -4.5,-3.1 4.5,3.1, height 12.99
"Cap Tant Pol Form A" [mm] "Tantalum Solid Electrolytic Chip Capacitors  with Conductive Polymer Electrode"
  rect 1.95x1.3 smd: 1(-1.225,0) 2(1.225,0)
  silkscreen extent -2.45,-0.6 -2.45,0.6, body extent -1.7,-0.85 1.7,0.85, height 1.8
"Cap Tant Pol Form B" [mm] "Cap Tantal 6.0mm*3.5*mm*2.8mm"
  rect 1.9x2.25 smd: 1(-1.35,0) 2(1.35,0)
  silkscreen extent -2.52,-1.5 1.75,1.8, body extent -1.75,-1.5 1.75,1.5, height 2.1
CAPC1608N [mm] "Chip Capacitor, Body 1.6x0.8mm, IPC Medium Density"
  rect 1x1 smd: 1(-0.8,0) 2(0.8,0)
  silkscreen extent -1.6,-0.4 -1.6,0.4, body extent -0.87,-0.48 0.87,0.48, height 0.85
CAPC2012N [mm] "Chip Capacitor, Body 2.0x1.3mm, IPC Medium Density"
  rect 1.3x1.5 smd: 1(-0.85,0) 2(0.85,0)
  silkscreen extent -1.8,-0.65 -1.8,0.65, body extent -1.1,-0.72 1.1,0.72, height 1.1
CC2530EM-Board [mm] "CC2530EM Eva Board"
  rect 2.8x0.75 smd paste+0 mask+0: x1_1(2.542,14.986) x1_2(6.602,14.986) x1_3(2.542,13.716) x1_4(6.602,13.716) x1_5(2.542,12.446) x1_6(6.602,12.446) x1_7(2.542,11.176) x1_8(6.602,11.176) x1_9(2.542,9.906) x1_10(6.602,9.906) x1_11(2.542,8.636) x1_12(6.602,8.636) x1_13(2.542,7.366) x1_14(6.602,7.366) x1_15(2.542,6.096) x1_16(6.602,6.096) x1_17(2.542,4.826) x1_18(6.602,4.826) x1_19(2.542,3.556) x1_20(6.602,3.556) x2_1(33.022,14.986) x2_2(37.082,14.986) x2_3(33.022,13.716) x2_4(37.082,13.716) x2_5(33.022,12.446) x2_6(37.082,12.446) x2_7(33.022,11.176) x2_8(37.082,11.176) x2_9(33.022,9.906) x2_10(37.082,9.906) x2_11(33.022,8.636) x2_12(37.082,8.636) x2_13(33.022,7.366) x2_14(37.082,7.366) x2_15(33.022,6.096) x2_16(37.082,6.096) x2_17(33.022,4.826) x2_18(37.082,4.826) x2_19(33.022,3.556) x2_20(37.082,3.556)
  round 0.5 hole 1 unplated paste-0.03: ""(4.572,14.351) ""(4.572,4.191) ""(35.052,4.191) ""(35.052,14.351)
  silkscreen extent 0,0 39.37,30.25, body extent -0.01,-0.01 39.38,30.26, height 6.5
"EA DOGS102X-6" [mm] "LCD Graphic Display 102*64 Dots SPI-Interface"
  round 1.2 hole 0.8: 1(-16.51,-17.2) 2(-13.97,-17.2) 13(13.97,-17.2) 14(16.51,-17.2) 15(16.51,20.9) 16(13.97,20.9) 17(11.43,20.9) 18(8.89,20.9) 19(6.35,20.9) 20(3.81,20.9) 21(1.27,20.9) 22(-1.27,20.9) 23(-3.81,20.9) 24(-6.35,20.9) 25(-8.89,20.9) 26(-11.43,20.9) 27(-13.97,20.9) 28(-16.51,20.9)
  silkscreen extent -19.5,-17.2 19.5,20.9, body extent -19.5,-17.47 19.5,21.12, height 9.1
"HARTING -09 18 514 7324" [mm] "HARTING - 09 18 514 7324"
  rect 1.6x1.6 hole 1: 1(-7.62,-1.27)
  round 1.6 hole 1: 2(-7.62,1.27) 3(-5.08,-1.27) 4(-5.08,1.27) 5(-2.54,-1.27) 6(-2.54,1.27) 7(0,-1.27) 8(0,1.27) 9(2.54,-1.27) 10(2.54,1.27) 11(5.08,-1.27) 12(5.08,1.27) 13(7.62,-1.27) 14(7.62,1.27)
  silkscreen extent -12.7,-4.5 12.7,4.5, body extent -12.8,-4.5 12.6,4.7, height 9.1
"HARTING -09 18 526 7324" [mm] "HARTING -09 18 526 7324"
  rect 1.6x1.6 hole 1: 1(-15.24,-1.27)
  round 1.6 hole 1: 2(-15.24,1.27) 3(-12.7,-1.27) 4(-12.7,1.27) 5(-10.16,-1.27) 6(-10.16,1.27) 7(-7.62,-1.27) 8(-7.62,1.27) 9(-5.08,-1.27) 10(-5.08,1.27) 11(-2.54,-1.27) 12(-2.54,1.27) 13(0,-1.27) 14(0,1.27) 15(2.54,-1.27) 16(2.54,1.27) 17(5.08,-1.27) 18(5.08,1.27) 19(7.62,-1.27) 20(7.62,1.27) 21(10.16,-1.27) 22(10.16,1.27) 23(12.7,-1.27) 24(12.7,1.27) 25(15.24,-1.27) 26(15.24,1.27)
  silkscreen extent -20.34,-4.5 20.32,4.63, body extent -20.24,-4.47 20.4,4.73, height 9.4
"HARTING D-SUB SMT 9 POLES" [mm]
  rect 1x1.8 smd: 1(5.48,1.42) 2(2.74,1.42) 3(0,1.42) 4(-2.74,1.42) 5(-5.48,1.42) 6(4.11,-1.42) 7(1.37,-1.42) 8(-1.37,-1.42) 9(-4.11,-1.42)
  rect 3.4x15 smd: 10(-13.2,0) 11(13.2,0)
  rect 0x0 hole 1.8: 10(-12.5,3.1) 11(12.5,3.1)
  silkscreen extent -8.25,-4 8.25,4, body extent -15.75,-6.25 15.75,6.25, height 12.55
"Molex 533980771" [mm] "MOLEX - 53398-0771 - STIFTLEISTE, SMT, 1.25MM, 7POL"
  rect 0.8x1.3 smd: 1(3.725,-1.35) 2(2.475,-1.35) 3(1.225,-1.35) 4(-0.025,-1.35) 5(-1.275,-1.35) 6(-2.525,-1.35) 7(-3.725,-1.35)
  rect 2.1x3 smd: 8(6.925,1.35) 9(-6.925,1.35)
  silkscreen extent -6.9,-2.1 6.9,3.1, body extent -6.95,-1.75 6.95,2.45, height 4.7
"MULTICOMP  CH004-2032LF" [mm] "MULTICOMP  CH004-2032LF  BATTERIEHALTER, SMT, 20MM"
  rect 2.6x3.5 smd: 1(-14.65,0) 2(14.65,0)
  rect 11x7 smd: 3(0,0)
  silkscreen extent -16.1,-10 16.1,10, body extent -16.05,-10.01 16.05,10.01, height 5.4
"Passmarke Rund 1mm" [mm] "Passmarke Zollner Rund 1mm 3mm Freistellung"
  round 1 smd paste+0 mask+0.5: 0(0,0)
  silkscreen extent -1,-1 1,1
"Quarz 2 Pin 4.1mm * 1.5mm" [mm] "Chip Resistor, 2-Leads, Body 4,1x1,5mm, IPC Medium Density"
  rect 1.1x1.9 smd: 1(-1.7,0)
  rect 1.1x1.7 smd: 2(1.7,0)
  silkscreen extent -1.3,-0.72 1.3,0.72, body extent -2.1,-0.8 2.1,0.8, height 0.6
RESC1608N [mm] "Chip Resistor, Body 1.6x0.8mm, IPC Medium Density"
  rect 0.9x1 smd: 1(-0.85,0) 2(0.85,0)
  silkscreen extent -0.2,-0.4 0.2,0.4, body extent -0.85,-0.48 0.85,0.48, height 0.6
RESC2012N [mm] "Chip Resistor, Body 2.0x1.3mm, IPC Medium Density"
  rect 1.2x1.4 smd: 1(-0.9,0) 2(0.9,0)
  silkscreen extent 0,-0.6 0,0.6, body extent -1.07,-0.7 1.07,0.7, height 0.65
SOIC127P600-8N [mm] "SOIC, 8-Leads, Body 4.9x3.9mm, Pitch 1.27mm, IPC Medium Density"
  oval 2.2x0.6 smd: 1(-2.4,1.905) 2(-2.4,0.635) 3(-2.4,-0.635) 4(-2.4,-1.905) 5(2.4,-1.905) 6(2.4,-0.635) 7(2.4,0.635) 8(2.4,1.905)
  silkscreen extent -2.53,-2.5 0.9,2.88, body extent -2,-2.5 2,2.5, height 1.75
SOIC-SN8_N [mm] "SOIC, 8-Leads, Body 4.9x3.8mm, Pitch 1.27mm, IPC Medium Density"
  oval 2.2x0.6 smd: 1(-2.4,1.905) 2(-2.4,0.635) 3(-2.4,-0.635) 4(-2.4,-1.905) 5(2.4,-1.905) 6(2.4,-0.635) 7(2.4,0.635) 8(2.4,1.905)
  silkscreen extent -2.53,-2.5 0.9,2.88, body extent -2,-2.5 2,2.5, height 1.75
SOT23-3N [mm] "SOT23, 3-Leads, Body 2.9x1.3mm, Pitch 0.95mm, Lead Span 2.5mm, IPC Medium Density"
  rect 1.5x0.6 smd: 1(-0.95,0.95) 2(-0.95,-0.95) 3(0.95,0)
  silkscreen extent -1.07,-1.5 0.7,1.92, body extent -0.7,-1.5 0.7,1.5, height 1.1
"SOT-323N (SC-70)" [mm] "SOT323, 3-Leads, Body 2x1.3mm, Pitch 0.65mm, Lead Span 2.1mm, IPC Medium Density"
  rect 0.4x0.7 smd: 1(-0.65,-1.041) 2(0.65,-1.041) 3(0,1.042)
  silkscreen extent -1.52,-1.17 1.1,0.28, body extent -1.1,-0.72 1.1,0.68, height 1.1
"Testpoint 1mm" [mm] "Testpoint 1mm"
  round 1 smd paste-1: 1(0,0)
  silkscreen extent -0.5,-0.5 0.5,0.5
"TI-DBV5 (SOT23-5)" [mm] "DBV (R-PDSO-G5)"
  rect 1.4x0.5 smd: 1(-1.1,0.95) 2(-1.1,0) 3(-1.1,-0.95) 4(1.1,-0.95) 5(1.1,0.95)
  silkscreen extent -0.8,-1.7 0.8,1.7, body extent -0.92,-1.82 0.92,1.82, height 1.45
TI-PZ100_N [mm] "QFP, 100-Leads, Body 14x14mm, Pitch 0.5mm, IPC Medium Density"
  oval 1.8x0.3 smd: 1(-7.55,6) 2(-7.55,5.5) 3(-7.55,5) 4(-7.55,4.5) 5(-7.55,4) 6(-7.55,3.5) 7(-7.55,3) 8(-7.55,2.5) 9(-7.55,2) 10(-7.55,1.5) 11(-7.55,1) 12(-7.55,0.5) 13(-7.55,0) 14(-7.55,-0.5) 15(-7.55,-1) 16(-7.55,-1.5) 17(-7.55,-2) 18(-7.55,-2.5) 19(-7.55,-3) 20(-7.55,-3.5) 21(-7.55,-4) 22(-7.55,-4.5) 23(-7.55,-5) 24(-7.55,-5.5) 25(-7.55,-6) 51(7.55,-6) 52(7.55,-5.5) 53(7.55,-5) 54(7.55,-4.5) 55(7.55,-4) 56(7.55,-3.5) 57(7.55,-3) 58(7.55,-2.5) 59(7.55,-2) 60(7.55,-1.5) 61(7.55,-1) 62(7.55,-0.5) 63(7.55,0) 64(7.55,0.5) 65(7.55,1) 66(7.55,1.5) 67(7.55,2) 68(7.55,2.5) 69(7.55,3) 70(7.55,3.5) 71(7.55,4) 72(7.55,4.5) 73(7.55,5) 74(7.55,5.5) 75(7.55,6)
  oval 0.3x1.8 smd: 26(-6,-7.55) 27(-5.5,-7.55) 28(-5,-7.55) 29(-4.5,-7.55) 30(-4,-7.55) 31(-3.5,-7.55) 32(-3,-7.55) 33(-2.5,-7.55) 34(-2,-7.55) 35(-1.5,-7.55) 36(-1,-7.55) 37(-0.5,-7.55) 38(0,-7.55) 39(0.5,-7.55) 40(1,-7.55) 41(1.5,-7.55) 42(2,-7.55) 43(2.5,-7.55) 44(3,-7.55) 45(3.5,-7.55) 46(4,-7.55) 47(4.5,-7.55) 48(5,-7.55) 49(5.5,-7.55) 50(6,-7.55) 76(6,7.55) 77(5.5,7.55) 78(5,7.55) 79(4.5,7.55) 80(4,7.55) 81(3.5,7.55) 82(3,7.55) 83(2.5,7.55) 84(2,7.55) 85(1.5,7.55) 86(1,7.55) 87(0.5,7.55) 88(0,7.55) 89(-0.5,7.55) 90(-1,7.55) 91(-1.5,7.55) 92(-2,7.55) 93(-2.5,7.55) 94(-3,7.55) 95(-3.5,7.55) 96(-4,7.55) 97(-4.5,7.55) 98(-5,7.55) 99(-5.5,7.55) 100(-6,7.55)
  silkscreen extent -7.67,-6.25 6.25,6.82, body extent -7,-7 7,7, height 1.6

## Part data
C1 C2 C3 C4 C5 C6 C7 C8 C9 C10 C11 C12 C13 C14 C15 C16 C17 C18 C19 C20 C22 C23 C26: library part "CAPC1608 (C0603)", "CAPC1608 (C0603)"
C21: library part "Cap Tant Pol Form B"
C24 C25: library part "Cap Tant Pol Form A", "Cap Tantal 3.2mm*1.6*mm*1.6mm"
C27 C28 C29 C30: library part "CAPC2012 (C0805)", "CAPC2012 (C0805)"
D1 D2 D3: "Diode Schottky Dual SOT-323 (SC70)"
IC1: library part MSP430F6779AIPZ, "Mikroprozessor 16bit Polyphase Metering"
IC2: "Voltageregulator low Current"
IC3 IC4: library part PS8802, "High Speed Optocoupler SO8"
IC5: "LCD Graphic Display 102*64 Dots SPI-Interface"
IC6: "2Kbit, 400kHz, 5V, I2C Serial EEPROM, 8-Pin SOIC 150mil, Extended Temperature"
IC7: library part CC2530EM, "CC2530EM Referenzdesign"
LED1 LED4 LED6 LED8: library part "WL-SMCW 0603  150060SS75000", "SMD mono-color Chip LED, WL-SMCW, Super Red"
LED2 LED5: library part "WL-SMCW 0603  150060VS75000", "SMD mono-color Chip LED, WL-SMCW, Bright Green"
LED3 LED7: library part "WL-SMCW 0603  150060YS75000", "SMD mono-color Chip LED, WL-SMCW, Yellow"
PM1 PM2 PM3 PM4 PM5 PM6 PM7 PM8: "Passmarke Rund 1mm 3mm Freistellung"
Q1: library part "Quarz 2 Pin 4.1mm * 1.5mm", "Quarz 2 Pin 4.1mm * 1.5mm"
R1 R2 R5 R6 R7 R8 R9 R10 R11 R12 R13 R14 R15 R16 R17 R18 R19 R20 R21 R22 R23 R24 R25 R26 R27 R28 R29 R30 R31 R32 R33 R34 R35 R36 R37 R38 R39 R40 R41 R42 R43 R44 R45 R46 R47 R48: library part "RESC1608 (R0603)", "RESC1608 (R0603)"
R3 R4: library part "RESC2012N (R0805)", "RESC2012N (R0805)"
ST1: library part "Stecker 3Pol universal", "Stecker 3Pol universal"
ST2: "Messerleiste Gerade 14Pol"
ST3: library part "Stecker 26Pol zweireihig universal"
ST4: library part "D Connector 9", "HARTING - 09 55 115 6611 741 - D-SUB, BUCHSE, SMT, M3, 9POL"
ST5: "Molex Pico 7Pol Blade SMD gerade 533980771"
SW1 SW2 SW3 SW4: "WS-TASV SMD Tact Switch 6X6 mm"
T1 T2: library part "Transistor PNP SOT-23", "Transistor PNP SOT-23"
TP1 TP2 TP3 TP4 TP5 TP6 TP7 TP8 TP9 TP10 TP11 TP12 TP13 TP14 TP15 TP16 TP17 TP18 TP19 TP20 TP21 TP22 TP23 TP24 TP25 TP26 TP27 TP28 TP29 TP30 TP31 TP32 TP33 TP34 TP35 TP36 TP37 TP38 TP39 TP40 TP41 TP42 TP43 TP44 TP45 TP46 TP47 TP48 TP49 TP50: library part "Tespoint 1mm"

## Free pads (board coordinates)
  round 9 hole 3.9: 0(11.75,56.715) 0(56.75,101.75) 0(101.75,56.715)

## Via types
v1: diameter 0.6, hole 0.3, Top Layer to Bottom Layer, tented both sides, 106 vias
v2: diameter 1, hole 0.6, Top Layer to Bottom Layer, tented both sides, 3 vias

## Nets (pads, with @x,y where several pads share a name; then routed paths per layer and width w, separated by ;. In a path a pad name is that pad's centre, name@x,y a point inside that pad or via, vN(x,y) a via of type N, cw(c..) or ccw(c..) an arc to the next point about the centre after c; other vN are vias at no path point)
/CHARGEEN: IC1.84 ST3.6 | length 54
  Top Layer w0.2: ST3.6@22.055,109.92 23.2,108.775 23.2,106.37 26.095,103.475 26.125,103.475 26.6,103 32.825,103 37.225,98.6 37.225,93.825 38.65,92.4 38.65,80.275 39.575,79.35 39.575,77.775 v1(41.225,76.125)
  Bottom Layer w0.2: v1(41.225,76.125) 46.455,76.125 47.93,74.65 IC1.84@49.165,74.65
/CHG: IC1.81 R13.2 ST3.3 | length 57.7
  Top Layer w0.2: ST3.3@19.515,107.38 19.515,107.36 21.075,105.8 22.174,105.8 26.024,101.95 32.39,101.95 36.175,98.165 36.175,93.39 37.6,91.965 37.6,79.84 38.4,79.04 38.4,77.129 38.725,76.804 v1(38.725,76.125)
  Bottom Layer w0.2: R13.2@19.25,105 19.25,105.925 19.515,106.19 ST3.3@19.515,107.38 ; v1(38.725,76.125) 38.725,76.122 39.972,74.875 46.15,74.875 47.875,73.15 IC1.81@49.165,73.15
/EXTCHARGE: IC1.83 R9.2 ST3.5 | length 54.6
  Top Layer w0.2: ST3.5@22.055,107.38 22.055,107.02 26.425,102.65 32.68,102.65 36.875,98.455 36.875,93.68 38.3,92.255 38.3,80.13 39.1,79.33 39.1,77.63 40.3,76.43 v1(40.3,76.125)
  Bottom Layer w0.2: ST3.5@22.055,107.38 22.05,107.375 22.05,106.025 22.25,105.825 R9.2@22.25,105 ; v1(40.3,76.125) 40.85,75.575 46.5,75.575 47.925,74.15 IC1.83@49.165,74.15
/PGOOD: IC1.82 R10.2 ST3.4 | length 62.3
  Top Layer w0.2: ST3.4@19.515,109.92 20.7,108.735 20.7,107.179 21.599,106.28 22.189,106.28 26.169,102.3 32.535,102.3 36.525,98.31 36.525,93.535 37.95,92.11 37.95,79.985 38.75,79.185 38.75,77.274 39.5,76.524 v1(39.5,76.125)
  Bottom Layer w0.2: ST3.4@19.515,109.92 20.75,108.685 R10.2@20.75,105 ; v1(39.5,76.125) 40.4,75.225 46.3,75.225 47.875,73.65 IC1.82@49.165,73.65
/RST: IC1.100 R7.1 ST2.11 | length 57.9
  Top Layer w0.2: v1(54.375,82.225) 54.8,82.65 67.03,82.65 69.55,85.17 69.55,104.61 70.085,105.145 76.06,105.145 ST2.11@78.295,107.38
  Bottom Layer w0.2: R7.1@42.565,82.65 47.3,82.65 IC1.100@49.165,82.65 50.375,82.65 50.596,82.871 53.729,82.871 v1(54.375,82.225)
ACLK: IC1.35 TP19.1 | length 5.8
  Bottom Layer w0.2: IC1.35@64.265,78.15 67.3,78.15 68.1,77.35 TP19.1@69.715,77.35
AGND: C1.1 C3.1 C4.1 C6.1 C7.1 C8.1 C9.1 IC1.10 IC1.18 R4.1 ST3.17 ST3.18 | length 26.1
  Bottom Layer w0.2: C8.1@52.75,90.8 C9.1@54.25,90.8 ; v1(54.25,91.875) C9.1@54.25,90.8 ; IC1.10@55.215,84.2 55.215,86.44 55.775,87 55.775,89.175 C1.1@55.75,89.2 55.75,89.725 55.475,90 54.475,90 54.25,90.225 C9.1@54.25,90.8 ; IC1.18@59.215,84.2 59.215,90.665 59.35,90.8 C3.1@60.25,90.8 C6.1@61.75,90.8 ; v1(61.75,92) C6.1@61.75,90.8 ; C4.1@64.75,90.8 C7.1@63.25,90.8 C6.1@61.75,90.8
  Bottom Layer w0.5: v1(59.81,95.9) R4.1@62.045,95.9
AUXVCC1: C16.2 IC1.22 R5.2 | length 13.7
  Bottom Layer w0.2: IC1.22@61.215,84.2 61.215,85.43 63.17,87.385 69.21,87.385 70,88.175 C16.2@70,89.2 71.45,89.2 R5.2@71.5,89.15
AUXVCC2: C15.2 IC1.21 R6.2 | length 11.2
  Bottom Layer w0.2: IC1.21@60.715,84.2 60.715,85.425 63.025,87.735 66.6,87.735 67,88.135 R6.2@67,89.15 67.05,89.2 C15.2@68.5,89.2
AUXVCC3: C12.2 C13.2 IC1.29 ST1.1 | length 92.8
  Top Layer w0.3: v1(31.5,89.275) 31.5,77.25 32.075,76.675 35.805,76.675 37.155,75.325 60.35,75.325 63.15,78.125 v1(73.125,78.125)
  Bottom Layer w0.3: ST1.1@11.115,93.1 11.115,90.735 v1(11.125,90.725) 12.55,89.3 31.475,89.3 v1(31.5,89.275) ; IC1.29@64.265,81.15 68.275,81.15 71.3,78.125 v1(73.125,78.125) 73.125,78.066 73.941,77.25 C13.2@74.7,77.25 C12.2@74.7,79
AVCC: C3.2 C6.2 IC1.19 R3.1 ST3.9 ST3.10 | length 9
  Bottom Layer w0.2: IC1.19@59.715,84.2 59.715,86.915 v1(60.25,87.45) C3.2@60.25,89.2 C6.2@61.75,89.2
  Bottom Layer w0.5: v1(59.85,93.825) R3.1@62.085,93.825
BT1: IC1.37 R24.1 SW1.2 SW1.4 | length 41.6
  Top Layer w0.2: v1(66.9,77.235) 67.81,76.325 69.375,76.325 76.525,69.175 76.525,57.175 75.965,56.615 SW1.4@75.965,53.625
  Top Layer w0.3: SW1.2@75.965,45.675 75.965,48.775 ; SW1.4@75.965,53.625 75.965,48.775 ; R24.1@78.215,48.8 75.99,48.8 75.965,48.775
  Bottom Layer w0.2: IC1.37@64.265,77.15 66.25,77.15 66.35,77.25 66.885,77.25 v1(66.9,77.235)
BT2: IC1.36 R25.1 SW2.2 SW2.4 | length 55.1
  Top Layer w0.2: v1(62.484,76.276) 67.364,76.276 67.665,75.975 69.23,75.975 76.175,69.03 76.175,57.375 74.325,55.525 65.39,55.525 64.965,55.1 SW2.4@64.965,53.625 64.965,48.75 ; SW2.2@64.965,45.675 64.965,48.75 ; R25.1@67.215,48.8 65.015,48.8 64.965,48.75
  Bottom Layer w0.2: v1(62.484,76.276) 62.484,77.109 63.05,77.675 64.24,77.675 IC1.36@64.265,77.65
BT3: IC1.34 R26.1 SW3.2 SW3.4 | length 67.7
  Top Layer w0.2: SW3.2@53.965,45.675 53.965,48.75 ; R26.1@56.215,48.8 54.015,48.8 53.965,48.75 ; v1(61.874,75.726) 63.124,75.726 63.125,75.725 63.228,75.828 67.317,75.828 67.52,75.625 69.085,75.625 75.825,68.885 75.825,57.52 74.28,55.975 55,55.975 53.965,54.94 SW3.4@53.965,53.625 53.965,48.75
  Bottom Layer w0.2: v1(61.874,75.726) 61.874,78.149 62.375,78.65 IC1.34@64.265,78.65
BT4: IC1.40 R27.1 SW4.2 SW4.4 | length 73.9
  Top Layer w0.2: SW4.2@42.965,45.675 42.965,48.8 ; R27.1@45.215,48.8 42.965,48.8 ; v1(62.5,75.175) 63.07,75.175 63.373,75.478 67.173,75.478 67.375,75.275 68.94,75.275 75.475,68.74 75.475,57.665 74.21,56.4 54.93,56.4 53.43,54.9 43.175,54.9 42.965,54.69 SW4.4@42.965,53.625 42.965,48.8
  Bottom Layer w0.2: v1(62.5,75.175) 62.975,75.65 IC1.40@64.265,75.65
CC_CLK: IC7.x1_16 R42.1 | length 13
  Top Layer w0.2: IC7.x1_16@23.904,68.602 23.904,71.379 24.425,71.9 31.15,71.9 32.3,70.75 R42.1@33.455,70.75
CC_CS: IC7.x1_14 R45.1 | length 14.3
  Top Layer w0.2: IC7.x1_14@22.634,68.602 22.634,71.909 22.975,72.25 R45.1@33.455,72.25
CC_MISO: IC7.x1_20 R44.1 | length 11.7
  Top Layer w0.2: IC7.x1_20@26.444,68.602 26.444,70.719 26.925,71.2 30.805,71.2 31.738,70.268 31.738,69.743 32.075,69.405 32.075,68.25 32.575,67.75 R44.1@33.455,67.75
CC_MOSI: IC7.x1_18 R43.1 | length 12.2
  Top Layer w0.2: IC7.x1_18@25.174,68.602 25.174,71.049 25.675,71.55 30.95,71.55 32.088,70.413 32.088,69.888 32.725,69.25 R43.1@33.455,69.25
CC_P0.0: IC7.x1_11 TP27.1 | length 4.4
  Top Layer w0.2: IC7.x1_11@21.364,64.542 21.364,61.061 21.45,60.975 21.45,60.185 TP27.1@21.415,60.15
CC_P0.1: IC7.x1_5 TP24.1 | length 2.9
  Top Layer w0.2: TP24.1@17.515,61.65 17.5,61.665 17.5,62.475 17.554,62.529 IC7.x1_5@17.554,64.542
CC_P0.2: IC7.x1_7 TP25.1 | length 4.4
  Top Layer w0.2: TP25.1@18.815,60.15 18.824,60.159 IC7.x1_7@18.824,64.542
CC_P0.3: IC7.x1_9 TP26.1 | length 2.9
  Top Layer w0.2: IC7.x1_9@20.094,64.542 20.094,62.681 20.215,62.56 TP26.1@20.215,61.65
CC_P0.4: IC7.x1_3 TP23.1 | length 4.4
  Top Layer w0.2: IC7.x1_3@16.284,64.542 16.284,61.325 16.315,61.294 TP23.1@16.315,60.15
CC_P0.5: IC7.x2_18 TP50.1 | length 5.9
  Top Layer w0.2: IC7.x2_18@25.174,99.082 25.174,100.875 25.449,101.15 TP50.1@29.215,101.15
CC_P0.6: IC7.x1_15 TP29.1 | length 4.4
  Top Layer w0.2: TP29.1@23.904,60.161 IC7.x1_15@23.904,64.542
CC_P0.7: IC7.x1_17 TP30.1 | length 2.9
  Top Layer w0.2: IC7.x1_17@25.174,64.542 25.174,62.75 25.215,62.709 TP30.1@25.215,61.65
CC_P1.0: IC7.x1_6 TP34.1 | length 3.1
  Top Layer w0.2: TP34.1@17.5,71.635 17.5,70.925 17.554,70.871 IC7.x1_6@17.554,68.602
CC_P1.1: IC7.x1_13 TP28.1 | length 2.9
  Top Layer w0.2: TP28.1@22.634,61.669 IC7.x1_13@22.634,64.542
CC_P1.2: IC7.x2_17 TP35.1 | length 2.9
  Top Layer w0.2: IC7.x2_17@25.174,95.022 25.174,92.951 25.215,92.91 TP35.1@25.215,92.15
CC_P1.3: IC7.x1_4 TP33.1 | length 4.6
  Top Layer w0.2: TP33.1@16.215,73.15 16.215,72.385 16.284,72.316 IC7.x1_4@16.284,68.602
CC_P2.0: IC7.x2_19 TP36.1 | length 2.7
  Top Layer w0.2: IC7.x2_19@26.472,95.05 TP36.1@29.215,95.05
CC_P2.1: IC7.x1_10 R46.1 | length 18
  Top Layer w0.2: IC7.x1_10@20.094,68.602 20.094,70.825 22.219,72.95 31.005,72.95 32.25,74.195 32.25,75.075 32.55,75.375 R46.1@33.465,75.375
CC_P2.2: IC7.x1_12 R47.1 | length 16
  Top Layer w0.2: IC7.x1_12@21.364,68.602 21.364,71.6 22.364,72.6 31.15,72.6 32.3,73.75 R47.1@33.455,73.75
CC_RESET: IC7.x2_15 R48.1 | length 4.6
  Top Layer w0.2: R48.1@23.904,90.411 IC7.x2_15@23.904,95.022